# Altium PCB Radio.PcbDoc
Units mm, origin at the board's own origin, x right, y up, seen from the top; angles counter-clockwise.
Board outline 56.13 x 65.02 mm, 4 copper layers (Top Layer, Internal Plane 1, Internal Plane 2, Bottom Layer), stack 1.516 mm thick; 67 components, 62 nets, 303 pads, 202 vias.
Unrouted connection lines stored in the file: 1.
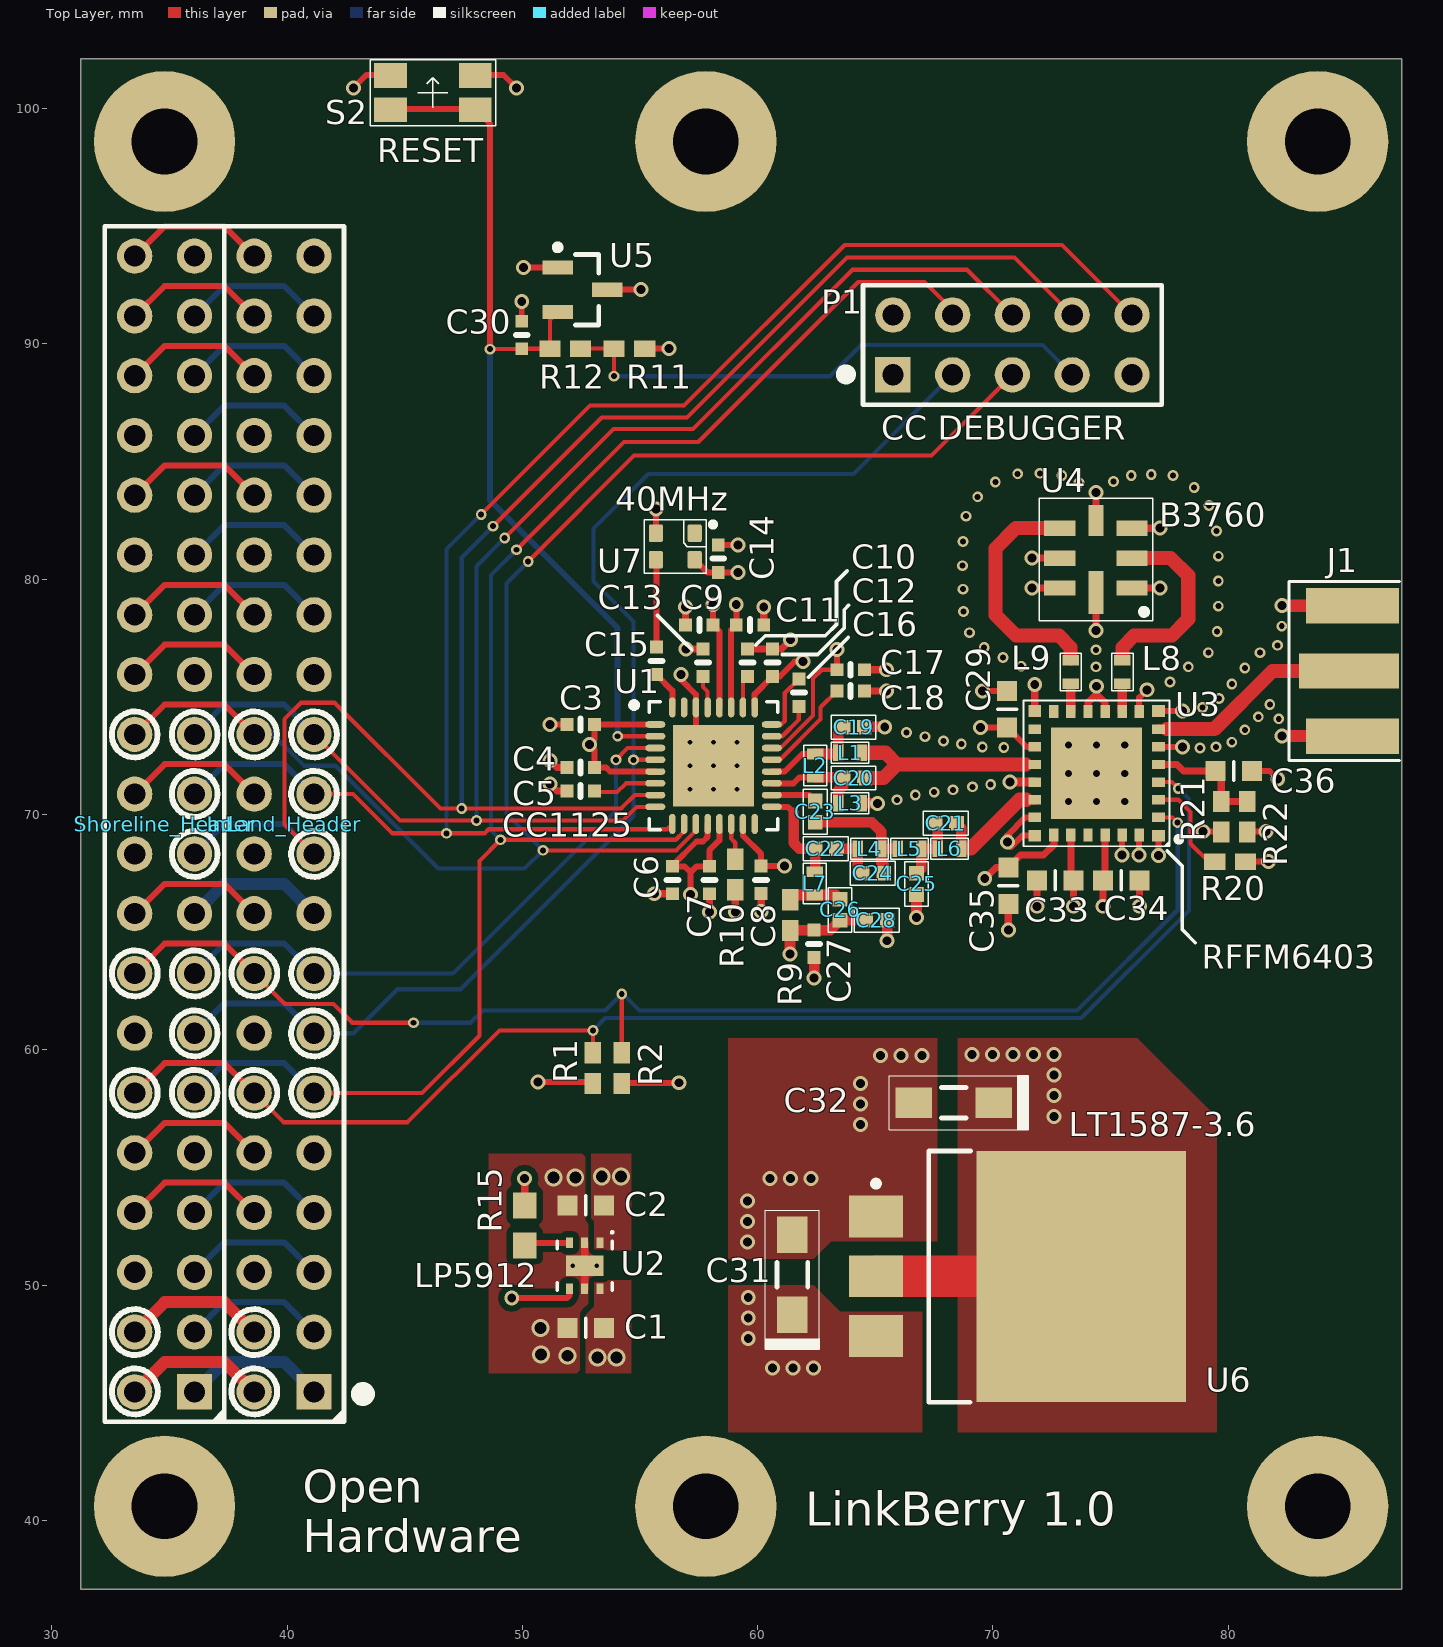
[diagram p0: Top Layer view]
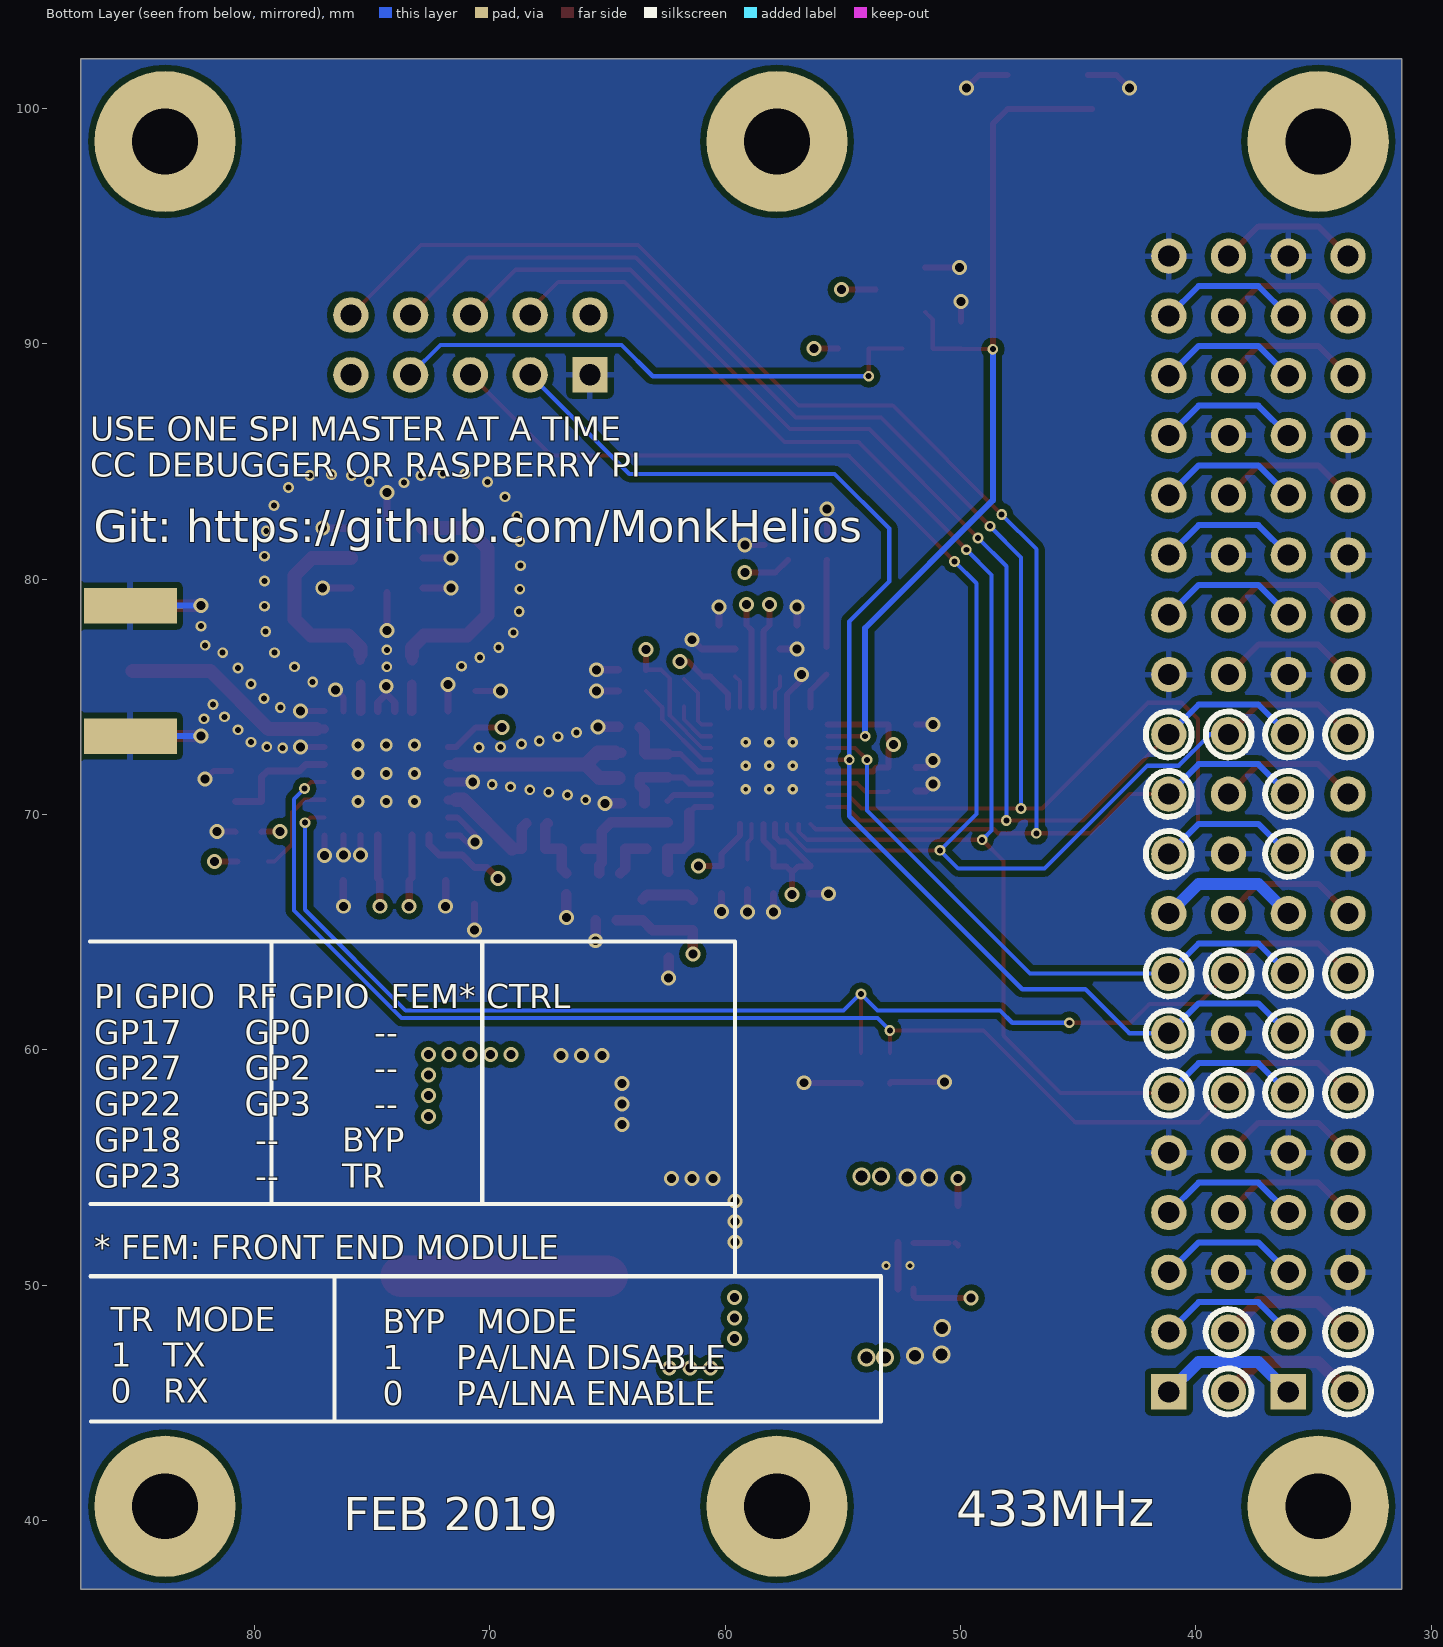
[diagram p1: Bottom Layer view, seen from below]
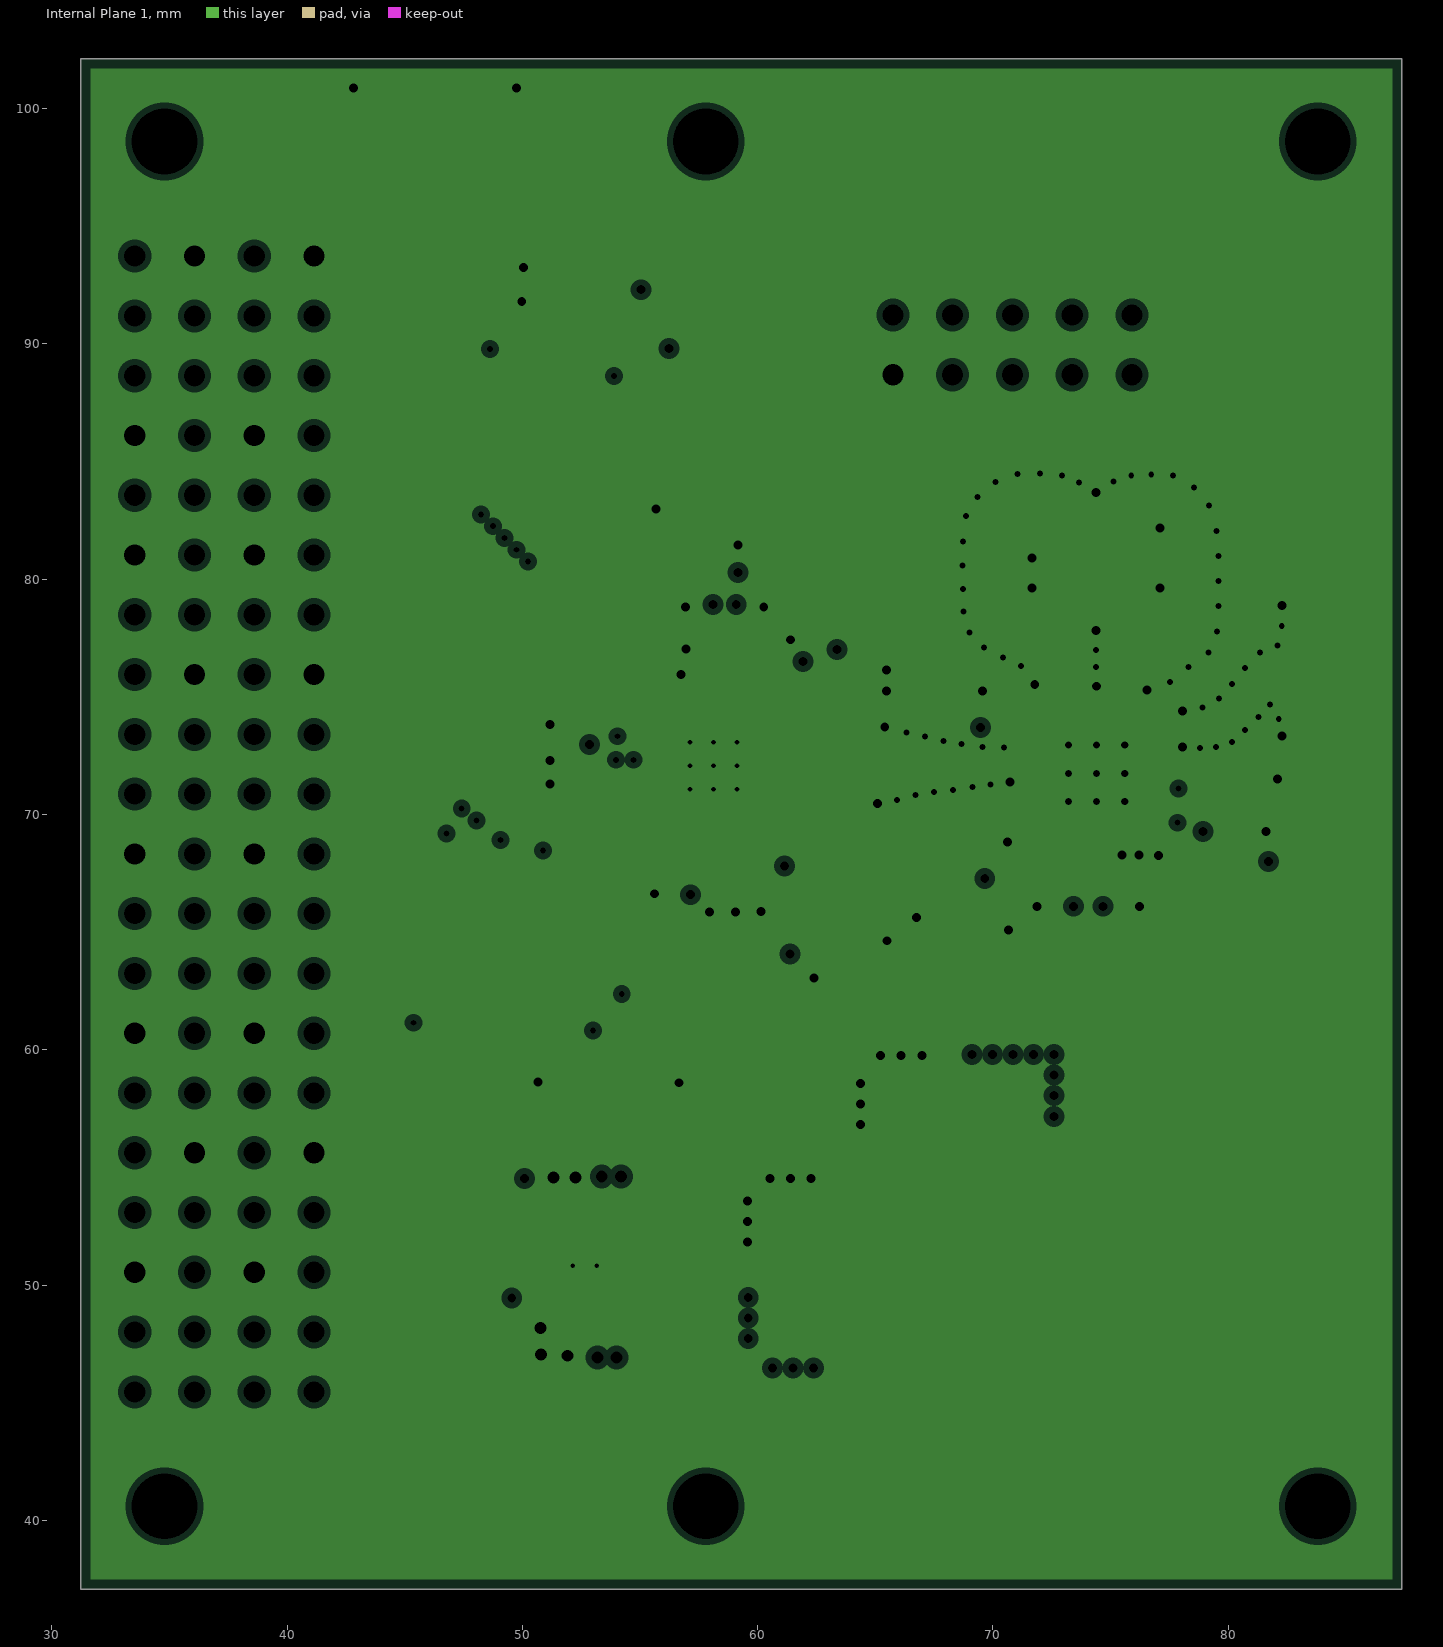
[diagram p2: Internal Plane 1, clearances drawn from the general rule]
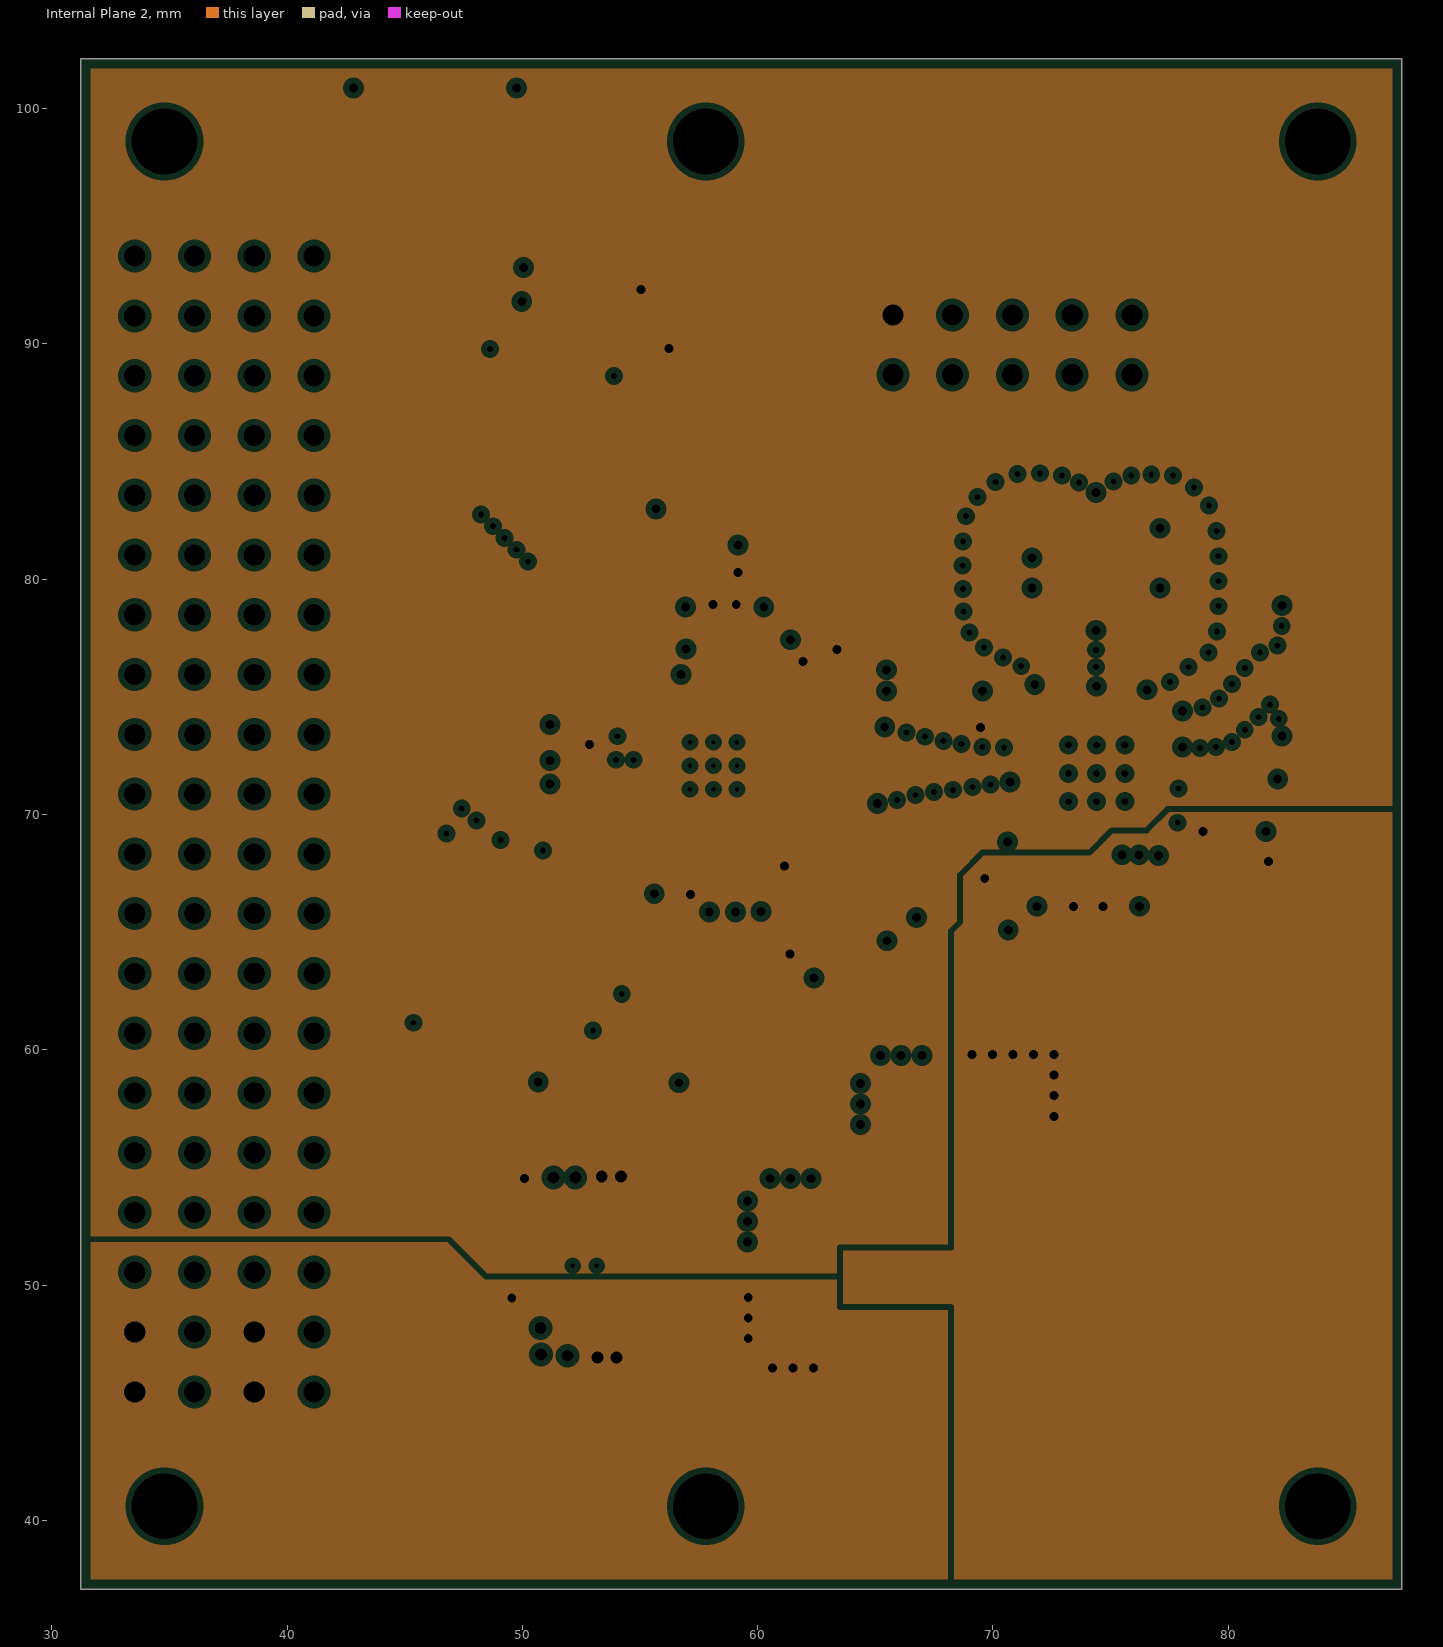
[diagram p3: Internal Plane 2, clearances drawn from the general rule]

## Layer stack, top to bottom
Top Solder: solder mask 0.0254, Solder Resist, Dk 3.5
Top Layer: signal copper 0.035
Dielectric 1: prepreg 0.35, FR-4, Dk 4.3
Internal Plane 1: plane copper 0.018, net GND
Dielectric 3: core 0.71, Dk 4.3
Internal Plane 2: plane copper 0.018, net (Multiple Nets)
Dielectric 2: prepreg 0.35, Dk 4.3
Bottom Layer: signal copper 0.035
Bottom Solder: solder mask 0.0254, Solder Resist, Dk 3.5

## Board outline
87.376,102.108 87.376,37.084 31.242,37.084 31.242,102.108

## Design rules (kind name [scope] priority, off if disabled: settings)
Clearance Clearance_16 [InNamedPolygon('GND_L04_P014')] p1: gap=0.254 ignorepadtopadclearanceinfootprint=FALSE except(0: Arc-Hole Track-Hole SMDPad-Hole THPad-Hole Via-Hole Fill-Hole Poly-Hole Region-Hole Text-Hole)
Clearance Clearance_15 [InNamedPolygon('GND_L04_P014')] p2: gap=0.203 ignorepadtopadclearanceinfootprint=FALSE
Clearance Clearance_14 [InNamedPolygon('top_VREG')] p3: gap=0.254 ignorepadtopadclearanceinfootprint=FALSE
Clearance Clearance_13 [InNamedPolygon('top_5V')] p4: gap=0.254 ignorepadtopadclearanceinfootprint=FALSE except(0: Arc-Hole Track-Hole SMDPad-Hole THPad-Hole Via-Hole Fill-Hole Poly-Hole Region-Hole Text-Hole)
Clearance Clearance_12 [InNamedPolygon('top_5V')] p5: gap=0.254 ignorepadtopadclearanceinfootprint=FALSE except(0: Arc-Hole Track-Hole SMDPad-Hole THPad-Hole Via-Hole Fill-Hole Poly-Hole Region-Hole Text-Hole)
Clearance Clearance_11 [InNamedPolygon('top_GND')] p6: gap=0.254 ignorepadtopadclearanceinfootprint=FALSE
Clearance Clearance_10 [InNamedPolygon('top_GND')] p7: gap=0.178 ignorepadtopadclearanceinfootprint=FALSE
Clearance Clearance_9 [InNamedPolygon('top_5V*')] p8: gap=0.178 ignorepadtopadclearanceinfootprint=TRUE
Clearance Clearance_8 [InNamedPolygon('top_GND')] p9: gap=0.203 ignorepadtopadclearanceinfootprint=FALSE
Clearance Clearance_7 [InNamedPolygon('top_GND')] p10: gap=0.254 ignorepadtopadclearanceinfootprint=TRUE
Clearance Clearance_6 [InNamedPolygon('top_GND*')] p11: gap=0.254 ignorepadtopadclearanceinfootprint=TRUE
Clearance Clearance_5 [InNamedPolygon('top_GND*')] p12: gap=0.178 ignorepadtopadclearanceinfootprint=TRUE
Clearance Clearance_4 [InNamedPolygon('top_VREG')] p13: gap=0.178 ignorepadtopadclearanceinfootprint=TRUE
Clearance Clearance_3 [InNamedPolygon('top_GND')] p14: gap=0.178 ignorepadtopadclearanceinfootprint=FALSE
Clearance Clearance_2 [InNamedPolygon('top_GND')] p15: gap=0.254 ignorepadtopadclearanceinfootprint=FALSE
Clearance Clearance_1 [InNamedPolygon('top_VREG')] p16: gap=0.254 ignorepadtopadclearanceinfootprint=TRUE
Clearance [All] p17: gap=0.127 ignorepadtopadclearanceinfootprint=TRUE
ComponentClearance [All] p1: gap=0 collisioncheckmode=3 verticalgap=0 showdistances=FALSE
MaxMinImpedance [All] p1: minimum=0.000 maximum=50.00
PermittedLayers [All] p1: toplayerpermitted=TRUE bottomlayerpermitted=TRUE
PlaneClearance [All] p1: clearance=0.254
PlaneConnect [All] p1: pad.planeconnectstyle=Relief pad.reliefexpansion=0.508 pad.reliefentries=4 pad.reliefconductorwidth=0.254 pad.reliefairgap=0.178 via.planeconnectstyle=Direct via.reliefexpansion=0.508 via.reliefentries=4 via.reliefconductorwidth=0.254 via.reliefairgap=0.254
PolygonConnect PolygonConnect_12 [All vs IsNamedPolygon('GND_L04_P014')] p1: thpad.connectstyle=Relief thpad.reliefconductorwidth=0.254 thpad.reliefentries=4 thpad.polygonreliefangle="90 Angle" thpad.airgapwidth=0.254 smdpad.connectstyle=Relief smdpad.reliefconductorwidth=0.254 smdpad.reliefentries=4 smdpad.polygonreliefangle="90 Angle" smdpad.airgapwidth=0.254 via.connectstyle=Direct via.reliefconductorwidth=0.254 via.reliefentries=4 via.polygonreliefangle="90 Angle" via.airgapwidth=0.254
PolygonConnect PolygonConnect_11 [All vs IsNamedPolygon('GND_L04_P014')] p2: thpad.connectstyle=Relief thpad.reliefconductorwidth=0.254 thpad.reliefentries=4 thpad.polygonreliefangle="90 Angle" thpad.airgapwidth=0.254 smdpad.connectstyle=Relief smdpad.reliefconductorwidth=0.254 smdpad.reliefentries=4 smdpad.polygonreliefangle="90 Angle" smdpad.airgapwidth=0.254 via.connectstyle=Direct via.reliefconductorwidth=0.254 via.reliefentries=4 via.polygonreliefangle="90 Angle" via.airgapwidth=0.254
PolygonConnect PolygonConnect_10 [All vs IsNamedPolygon('GND_L04_P014')] p3: thpad.connectstyle=Relief thpad.reliefconductorwidth=0.254 thpad.reliefentries=4 thpad.polygonreliefangle="90 Angle" thpad.airgapwidth=0.254 smdpad.connectstyle=Relief smdpad.reliefconductorwidth=0.254 smdpad.reliefentries=4 smdpad.polygonreliefangle="90 Angle" smdpad.airgapwidth=0.254 via.connectstyle=Direct via.reliefconductorwidth=0.254 via.reliefentries=4 via.polygonreliefangle="90 Angle" via.airgapwidth=0.254
PolygonConnect PolygonConnect_9 [All vs IsNamedPolygon('top_GND')] p4: connectstyle=Direct reliefconductorwidth=0.254 reliefentries=4 polygonreliefangle="90 Angle" airgapwidth=0.254
PolygonConnect PolygonConnect_8 [All vs IsNamedPolygon('top_GND')] p5: thpad.connectstyle=Relief thpad.reliefconductorwidth=0.254 thpad.reliefentries=4 thpad.polygonreliefangle="90 Angle" thpad.airgapwidth=0.254 smdpad.connectstyle=Relief smdpad.reliefconductorwidth=0.432 smdpad.reliefentries=4 smdpad.polygonreliefangle="90 Angle" smdpad.airgapwidth=0.178 via.connectstyle=Relief via.reliefconductorwidth=0.254 via.reliefentries=4 via.polygonreliefangle="90 Angle" via.airgapwidth=0.254
PolygonConnect PolygonConnect_7 [All vs IsNamedPolygon('top_GND')] p6: thpad.connectstyle=Relief thpad.reliefconductorwidth=0.254 thpad.reliefentries=4 thpad.polygonreliefangle="90 Angle" thpad.airgapwidth=0.254 smdpad.connectstyle=Relief smdpad.reliefconductorwidth=0.254 smdpad.reliefentries=4 smdpad.polygonreliefangle="90 Angle" smdpad.airgapwidth=0.254 via.connectstyle=Direct via.reliefconductorwidth=0.254 via.reliefentries=4 via.polygonreliefangle="90 Angle" via.airgapwidth=0.254
PolygonConnect PolygonConnect_6 [All vs IsNamedPolygon('top_5V*')] p7: connectstyle=Direct reliefconductorwidth=0.254 reliefentries=4 polygonreliefangle="90 Angle" airgapwidth=0.254
PolygonConnect PolygonConnect_5 [All vs IsNamedPolygon('top_GND')] p8: connectstyle=Direct reliefconductorwidth=0.254 reliefentries=4 polygonreliefangle="90 Angle" airgapwidth=0.254
PolygonConnect PolygonConnect_4 [All vs IsNamedPolygon('top_VREG')] p9: connectstyle=Direct reliefconductorwidth=0.254 reliefentries=4 polygonreliefangle="90 Angle" airgapwidth=0.254
PolygonConnect PolygonConnect_3 [All vs IsNamedPolygon('top_5V')] p10: connectstyle=Direct reliefconductorwidth=0.254 reliefentries=4 polygonreliefangle="90 Angle" airgapwidth=0.254
PolygonConnect PolygonConnect_2 [All vs IsNamedPolygon('top_GND*')] p11: connectstyle=Direct reliefconductorwidth=0.254 reliefentries=4 polygonreliefangle="90 Angle" airgapwidth=0.254
PolygonConnect PolygonConnect_1 [All vs IsNamedPolygon('top_3V6')] p12: connectstyle=Direct reliefconductorwidth=0.254 reliefentries=4 polygonreliefangle="90 Angle" airgapwidth=0.254
PolygonConnect [All] p13: thpad.connectstyle=Relief thpad.reliefconductorwidth=0.254 thpad.reliefentries=4 thpad.polygonreliefangle="90 Angle" thpad.airgapwidth=0.178 smdpad.connectstyle=Relief smdpad.reliefconductorwidth=0.254 smdpad.reliefentries=4 smdpad.polygonreliefangle="90 Angle" smdpad.airgapwidth=0.178 via.connectstyle=Direct via.reliefconductorwidth=0.254 via.reliefentries=4 via.polygonreliefangle="90 Angle" via.airgapwidth=0.254
RoutingVias [All] p1: holewidth=0.381 width=0.762 viastyle="Through Hole" minholewidth=0.254 minwidth=0.457 maxholewidth=0.762 maxwidth=1.27
SilkToSilkClearance [All] p1: silktosilkclearance=0.051
SilkToSolderMaskClearance [IsPad] p1: minsilkscreentomaskgap=0.051 clearancetoexposedcopper=TRUE
SolderMaskExpansion [All] p1: expansion=0.051
UnRoutedNet [All] p1: checkbadconnections=TRUE
ViasUnderSMD [All] p1: allowed=TRUE
Width [All] p1: maxlimit=2.54 minlimit=0.127 preferedwidth=0.178
24 further rules are at their usual default settings.

## Components (designator, comment, footprint, x,y, rotation, side; value= is the part's Value field where it differs from the comment)
C1 "10µF" SMD-0603C 52.7,48.189 r270 top
C2 "2.2µF" SMD-0603C 52.7,53.389 r270 top
C3 "47nF" SMD-0402C 52.475,73.825 r90 top
C4 "47nF" SMD-0402C 52.475,72 r90 top
C5 "220nF" SMD-0402C 52.475,71 r90 top
C6 "47nF" SMD-0402C 56.375,67.216 r0 top
C7 "47nF" SMD-0402C 57.95,67.216 r0 top
C8 "47nF" SMD-0402C 60.15,67.225 r0 top
C9 "47nF" SMD-0402C 57.525,78.05 r90 top
C10 "47nF" SMD-0402C 59.575,76.45 r180 top
C11 "47nF" SMD-0402C 59.675,78.05 r90 top
C12 "47nF" SMD-0402C 60.625,76.45 r0 top
C13 "47nF" SMD-0402C 57.675,76.45 r180 top
C14 "100nF" SMD-0402C 58.325,80.875 r180 top
C15 "22pF" SMD-0402C 55.7,76.525 r180 top
C16 "1.8nF" SMD-0402C 61.75,75.175 r0 top
C17 "47nF" SMD-0402C 63.95,76.15 r270 top
C18 "10nF" SMD-0402C 63.95,75.25 r270 top
C19 "C0402" 0402 63.625,73.7 r0 top value=5.1pF
C20 "C0402" 0402 63.625,71.55 r0 top value=5.1pF
C21 "C0402" 0402 67.55,69.625 r0 top value=DNM
C22 "C0402" 0402 62.45,68.55 r0 top value=39pF
C23 "C0402" 0402 62.45,69.675 r90 top value=5.1pF
C24 "C0402" 0402 64.45,67.5 r0 top value=2.2pF
C25 "C0402" 0402 66.75,66.6 r90 top value=6.2pF
C26 "C0402" 0402 63.5,65.5 r90 top value=56pF
C27 "10nF" SMD-0402C 62.4,64.5 r0 top
C28 "C0402" 0402 65.5,65.5 r180 top value=100pF
C29 "0.1µF" SMD-0603C 70.6,74.475 r0 top
C30 "1nF" SMD-0402C 49.975,90.375 r180 top
C31 "Component_1" PCBComponent_1#1 62.618,47.275 r90 top
C32 "Component_1" PCBComponent_1#1 71.5,58.893 r180 top
C33 "1µF" SMD-0603C 72.65,67.2 r270 top
C34 "1µF" SMD-0603C 75.45,67.2 r90 top
C35 "0.1µF" SMD-0603C 70.65,66.975 r180 top
C36 "0.1µF" SMD-0603C 80.225,71.85 r270 top
InLand_Header "Header 20X2" HDR2X20 41.148,45.466 r90 top
J1 "SMA EDGE" PCBComponent_1#2 85.125,76.1 r180 top
L1 "Component_1" LQW15AN80 63.925,72.625 r180 top
L2 "Component_1" LQW15AW80 62.45,72.075 r90 top
L3 "Component_1" LQW15AN80 63.925,70.475 r180 top
L4 "Component_1" LQW15AN80 64.75,68.55 r180 top
L5 "Component_1" LQW15AN80 66.45,68.55 r180 top
L6 "Component_1" LQW15AN80 68.15,68.55 r180 top
L7 "Component_1" LQW15AW80 62.425,67.075 r90 top
L8 "Component_1" LQW15AN80 75.5,76.05 r90 top
L9 "Component_1" LQW15AN80 73.3,76.05 r270 top
P1 "CC DEBUGGER" HDR2X5 65.745,88.685 r0 top
R1 "10K" 2-0402 53,59.225 r90 top
R2 "10K" 2-0402 54.225,59.225 r90 top
R9 "ERJ2GE" 2-0402 61.375,65.725 r90 top value=18
R10 "ERJ2GE" 2-0402 59.05,67.45 r90 top value=56K
R11 "10K" 2-0402 54.55,89.8 r0 top
R12 "10K" 2-0402 51.825,89.8 r0 top
R15 "ERA3Y" ERA-0603 50.1,52.539 r90 top value=47K
R20 "ERJ2GE" 2-0402 80.075,68 r180 top value=1K
R21 "ERJ2GE" 2-0402 79.7,69.9 r270 top value=3.3K
R22 "ERJ2GE" 2-0402 80.8,69.9 r90 top value=5.6K
S2 "RESET SWITCH" PCBComponent_1#3 46.2,100.675 r180 top
Shoreline_Header "Header 20X2" HDR2X20 36.068,45.466 r90 top
U1 "CC1125" "CC1125 QFN" 58.125,72.075 r0 top
U2 "LP5912" LP5912_WSON 52.65,50.825 r270 top
U3 "RFFM6403" PCBComponent_1#4 74.4,71.75 r180 top
U4 "B3760" PCBComponent_1#5 75.91,79.625 r90 top
U5 "TLV803S" SOT95P237X110-3N 52.55,92.3 r0 top
U6 "LT1587-3.6" LT1587 71.225,50.375 r0 top
U7 "TG-5006CJ" TG-5006CJ 55.675,80.825 r0 top

## Footprints (in the part's own frame and the unit in brackets; to place one, negate y for a bottom-side part, rotate by r counter-clockwise, add the part's x,y. Pads: shape width x height; smd on the part's side, far side on the other; paste and mask are expansions set on the pad)
2-0402 [mm] "Chip Resistor; Body 1 x 0.5 mm (LxW typ)"
  rect 0.9x0.7 smd: 1(-0.65,0) 2(0.65,0)
0402 [mm] "Chip Capacitor; Body 1.0 x 0.5 mm (LxW typ)"
  rect 0.62x0.62 smd mask+0.08: 1(0,0) 2(0.9,0)
  silkscreen extent -0.51,-0.51 1.4,0.51
"CC1125 QFN" [mm] "QFN, 32-Leads, Body 5.00x5.00mm, Pitch 0.50mm, Thermal Pad 3.78x3.78mm, IPC Medium Density"
  oval 0.85x0.28 smd: 1(-2.475,1.75) 2(-2.475,1.25) 3(-2.475,0.75) 4(-2.475,0.25) 5(-2.475,-0.25) 6(-2.475,-0.75) 7(-2.475,-1.25) 8(-2.475,-1.75) 17(2.475,-1.75) 18(2.475,-1.25) 19(2.475,-0.75) 20(2.475,-0.25) 21(2.475,0.25) 22(2.475,0.75) 23(2.475,1.25) 24(2.475,1.75)
  oval 0.28x0.85 smd: 9(-1.75,-2.475) 10(-1.25,-2.475) 11(-0.75,-2.475) 12(-0.25,-2.475) 13(0.25,-2.475) 14(0.75,-2.475) 15(1.25,-2.475) 16(1.75,-2.475) 25(1.75,2.475) 26(1.25,2.475) 27(0.75,2.475) 28(0.25,2.475) 29(-0.25,2.475) 30(-0.75,2.475) 31(-1.25,2.475) 32(-1.75,2.475)
  rect 3.45x3.45 smd paste-0.6: 33(0,0)
  silkscreen extent -3.5,-2.73 2.73,2.72, body extent -2.57,-2.58 2.58,2.57, height 1
ERA-0603 [mm] "Chip Resistor; Body 1.6 x 0.8 mm (LxW typ)"
  rect 1.1x1 smd: 1(-0.85,0) 2(0.85,0)
HDR2X5 [mm] "Connector; Header; 5x2 Position"
  rect 1.5x1.5 hole 0.9: 1(0,0)
  round 1.5 hole 0.9: 2(0,2.54) 3(2.54,0) 4(2.54,2.54) 5(5.08,0) 6(5.08,2.54) 7(7.62,0) 8(7.62,2.54) 9(10.16,0) 10(10.16,2.54)
  silkscreen extent -1.27,-1.27 11.43,3.81
HDR2X20 [mm] "Connector; Header; 20x2 Position"
  rect 1.5x1.5 hole 0.9: 1(0,0)
  round 1.5 hole 0.9: 2(0,2.54) 3(2.54,0) 4(2.54,2.54) 5(5.08,0) 6(5.08,2.54) 7(7.62,0) 8(7.62,2.54) 9(10.16,0) 10(10.16,2.54) 11(12.7,0) 12(12.7,2.54) 13(15.24,0) 14(15.24,2.54) 15(17.78,0) 16(17.78,2.54) 17(20.32,0) 18(20.32,2.54) 19(22.86,0) 20(22.86,2.54) 21(25.4,0) 22(25.4,2.54) 23(27.94,0) 24(27.94,2.54) 25(30.48,0) 26(30.48,2.54) 27(33.02,0) 28(33.02,2.54) 29(35.56,0) 30(35.56,2.54) 31(38.1,0) 32(38.1,2.54) 33(40.64,0) 34(40.64,2.54) 35(43.18,0) 36(43.18,2.54) 37(45.72,0) 38(45.72,2.54) 39(48.26,0) 40(48.26,2.54)
  silkscreen extent -1.27,-1.27 49.53,3.81
LP5912_WSON [mm] "SON, 6-Leads, Body 2.00x2.00mm, Pitch 0.65mm, Thermal Pad 1.60x0.89mm, IPC Medium Density"
  rect 0.45x0.3 smd: 1(-0.975,0.65) 2(-0.975,0) 3(-0.975,-0.65) 4(0.975,-0.65) 5(0.975,0) 6(0.975,0.65)
  rect 0.89x1.6 smd: 7(0,0)
  silkscreen extent -1.47,-1.17 1.05,1.22, body extent -1.05,-1.05 1.05,1.05, height 0.8
LQW15AN80 [mm] "chip inductor , wire wound"
  rect 0.45x0.7 smd: 1(-0.5,0) 2(0.5,0)
  silkscreen extent -0.8,-0.45 0.8,0.45, body extent -0.55,-0.3 0.55,0.3, height 0.6
LQW15AW80 [mm] "Chip Inductor, 2-Leads, Body 1.02x0.61mm, IPC Medium Density"
  rect 0.45x0.7 smd: 1(-0.495,0) 2(0.495,0)
  silkscreen extent -0.86,-0.48 0.86,0.48, body extent -0.56,-0.36 0.56,0.36, height 0.61
LT1587 [mil] "D2-PAK, 4-Pads, Body 7.80x8.63mm (max), IPC Medium Density"
  rect 90x70 smd: 1(-244.09,100) 2(-244.09,0) 3(-244.09,-100)
  rect 350x420 smd paste-62.99: 4(99.41,0)
  silkscreen extent -249,-211 -86,210
PCBComponent_1#1 [mm]
  rect 1.55x1.3 smd: 1(1.475,1.143) 2(4.875,1.143)
  silkscreen extent 0,0 5.9,2.29, body extent 1.05,0.51 5.3,1.78, height 1.27
PCBComponent_1#2 [mm]
  rect 4.25x1.5 smd mask+0.05: 1(0,0)
  rect 3.95x1.5 smd mask+0.05: 2(-0.15,2.77) 2(-0.15,-2.77)
  rect 3.95x1.5 smd far side mask+0.05: 2(-0.15,2.77) 2(-0.15,-2.77)
  silkscreen extent -2.16,-3.81 2.54,3.81
PCBComponent_1#3 [mm]
  rect 1.4x1.05 smd mask+0.05: 1(-1.8,0.725) 2(-1.8,-0.725) 3(1.8,-0.725) 4(1.8,0.725)
  silkscreen extent -2.67,-1.4 2.67,1.4
PCBComponent_1#4 [mm]
  rect 0.55x0.5 smd paste-0.02 mask+0.065: 1(-2.625,2.65) 8(-2.625,-2.65) 15(2.625,-2.65) 22(2.625,2.65)
  rect 0.55x0.4 smd paste-0.02 mask+0.065: 2(-2.625,1.875) 3(-2.625,1.125) 4(-2.625,0.375) 5(-2.625,-0.375) 6(-2.625,-1.125) 7(-2.625,-1.875) 16(2.625,-1.875) 17(2.625,-1.125) 18(2.625,-0.375) 19(2.625,0.375) 20(2.625,1.125) 21(2.625,1.875)
  rect 0.4x0.55 smd paste-0.02 mask+0.065: 9(-1.813,-2.625) 10(-1.088,-2.625) 11(-0.363,-2.625) 12(0.363,-2.625) 13(1.088,-2.625) 14(1.813,-2.625) 23(1.813,2.625) 24(1.088,2.625) 25(0.363,2.625) 26(-0.363,2.625) 27(-1.088,2.625) 28(-1.813,2.625)
  rect 3.875x3.875 smd paste-0.7 mask+0.065: 29(0,0)
  silkscreen extent -3.6,-3.1 3.1,3.1
PCBComponent_1#5 [mm]
  rect 0.65x1.33 smd: 1(0,0) 2(1.27,0) 3(2.54,0) 5(2.54,3.07) 6(1.27,3.07) 7(0,3.07)
  rect 1.33x0.65 smd: 4(2.87,1.535)
  rect 1.83x0.65 smd: 8(-0.2,1.535)
  silkscreen extent -1.4,-0.89 3.81,3.94
SMD-0402C [mm]
  rect 0.55x0.55 smd: 1(0,0.584) 2(0,-0.584)
  silkscreen extent -0.25,0 0.25,0, body extent -0.25,-0.51 0.25,0.51, height 0.51
SMD-0603C [mm]
  rect 0.85x0.85 smd: 1(0,0.775) 2(0,-0.775)
  silkscreen extent -0.4,0 0.4,0, body extent -0.4,-0.8 0.4,0.8, height 0.9
SOT95P237X110-3N [mm] "SOT23, 3-Leads, Body 2.90x2.37mm, Pitch 0.95mm, IPC Medium Density"
  rect 1.3x0.6 smd: 1(-1.05,0.95) 2(-1.05,-0.95) 3(1.05,0)
  silkscreen extent -1.17,-1.5 0.7,1.92, body extent -1.32,-1.5 1.32,1.5, height 1.1
TG-5006CJ [mm]
  rrect25% 0.6x0.75 smd: 1(1.65,1.13) 2(0,1.13) 3(0,0) 4(1.65,0)
  silkscreen extent -0.5,-0.58 2.52,1.7

## Part data
C1 C2 C29 C35 C36: library part GCJ188R71C104KA01D, "CAP CER 0.1UF 16V X7R 0603", Digi-Key Part Number=490-5796-1-ND, Manufacturer="Murata Electronics North America", Operating Temperature="-55°C ~ 125°C", Package / Case="0603 (1608 Metric)", Ratings=AEC-Q200, Temperature Coefficient=X7R, Tolerance=±10%, Voltage=16V, @ qty=0, Applications="Automotive, Boardflex Sensitive", Datasheets=http://www.murata.com/~/media/webrenewal/support/library/catalog/products/capacitor/mlcc/c03e.ashx, Factory Stock=0, Features="Soft Termination", Height - Seated (Max)=-, Image=//media.digikey.com/Renders/Murata%20Renders/0603%28LQG18%29.jpg, Lead Spacing=-, Lead Style=-, Minimum Quantity=1, Mounting Type="Surface Mount, MLCC", Packaging="Cut Tape (CT)", Part Number=GCJ188R71C104KA01D, Part Status=Active, Quantity Available=22473, Series=GCJ, Size / Dimension="0.063\" L x 0.031\" W (1.60mm x 0.80mm)", Thickness (Max)="0.035\" (0.90mm)", Unit Price (USD)=0.21
C3 C4 C5 C6 C7 C8 C9 C10 C11 C12 C13 C14 C17 C18 C27 C30: library part GCM155C71A105KE38D, "CAP CER 1UF 10V X7S 0402", Digi-Key Part Number=490-13409-1-ND, Manufacturer="Murata Electronics North America", Operating Temperature="-55°C ~ 125°C", Package / Case="0402 (1005 Metric)", Ratings=AEC-Q200, Temperature Coefficient=X7S, Tolerance=±10%, Voltage=10V, @ qty=0, Applications=Automotive, Datasheets=http://www.murata.com/~/media/webrenewal/support/library/catalog/products/capacitor/mlcc/c03e.ashx, Factory Stock=0, Features=-, Height - Seated (Max)=-, Image=//media.digikey.com/Renders/Murata%20Renders/ZRB-SERIES-0402.jpg, Lead Spacing=-, Lead Style=-, Minimum Quantity=1, Mounting Type="Surface Mount, MLCC", Packaging="Cut Tape (CT)", Part Number=GCM155C71A105KE38D, Part Status=Active, Quantity Available=7240, Series=GCM, Size / Dimension="0.039\" L x 0.020\" W (1.00mm x 0.50mm)", Thickness (Max)="0.022\" (0.55mm)", Unit Price (USD)=0.12
C15: library part GCM155C71A105KE38D, "CAP CER 1UF 50V NP0 0402", Digi-Key Part Number=490-13409-1-ND, Manufacturer="Murata Electronics North America", Operating Temperature="-55°C ~ 125°C", Package / Case="0402 (1005 Metric)", Ratings=AEC-Q200, Temperature Coefficient=X7S, Tolerance=±10%, Voltage=10V, @ qty=0, Applications=Automotive, Datasheets=http://www.murata.com/~/media/webrenewal/support/library/catalog/products/capacitor/mlcc/c03e.ashx, Factory Stock=0, Features=-, Height - Seated (Max)=-, Image=//media.digikey.com/Renders/Murata%20Renders/ZRB-SERIES-0402.jpg, Lead Spacing=-, Lead Style=-, Minimum Quantity=1, Mounting Type="Surface Mount, MLCC", Packaging="Cut Tape (CT)", Part Number=GCM155C71A105KE38D, Part Status=Active, Quantity Available=7240, Series=GCM, Size / Dimension="0.039\" L x 0.020\" W (1.00mm x 0.50mm)", Thickness (Max)="0.022\" (0.55mm)", Unit Price (USD)=0.12
C16: library part GCM155C71A105KE38D, "CAP CER 1.8nF 10V X7S 0402", Digi-Key Part Number=490-13409-1-ND, Manufacturer="Murata Electronics North America", Operating Temperature="-55°C ~ 125°C", Package / Case="0402 (1005 Metric)", Ratings=AEC-Q200, Temperature Coefficient=X7S, Tolerance=±10%, Voltage=10V, @ qty=0, Applications=Automotive, Datasheets=http://www.murata.com/~/media/webrenewal/support/library/catalog/products/capacitor/mlcc/c03e.ashx, Factory Stock=0, Features=-, Height - Seated (Max)=-, Image=//media.digikey.com/Renders/Murata%20Renders/ZRB-SERIES-0402.jpg, Lead Spacing=-, Lead Style=-, Minimum Quantity=1, Mounting Type="Surface Mount, MLCC", Packaging="Cut Tape (CT)", Part Number=GCM155C71A105KE38D, Part Status=Active, Quantity Available=7240, Series=GCM, Size / Dimension="0.039\" L x 0.020\" W (1.00mm x 0.50mm)", Thickness (Max)="0.022\" (0.55mm)", Unit Price (USD)=0.12
C19 C20 C21 C22 C23 C24 C25 C26 C28: "Ceramic Chip Capacitor - Standard", PackageDocument=Mar-2001, Code_IPC="1005 [0402]", Code_JEITA=0402, ComponentLink1Description="Manufacturer Link", ComponentLink1URL=http://www.kemet.com/, ComponentLink2Description=Datasheet, ComponentLink2URL=http://www.kemet.com/kemet/web/homepage/kechome.nsf/vapubfilesname/F3102TA.pdf/$file/F3102TA.pdf, DatasheetDocument=Mar-2001, LatestRevisionDate=19-Mar-2004, LatestRevisionNote="Silkscreen size reduced.", Note="Footprint corresponds to dimensions for bulk cassette packaging. This case size has tightened tolerances.", PackageReference=0402, Published=17-Jul-2002, Publisher="Altium Limited"
C33 C34: library part GCJ188R71C104KA01D, "CAP CER 1UF 16V X7R 0603", Digi-Key Part Number=490-5796-1-ND, Manufacturer="Murata Electronics North America", Operating Temperature="-55°C ~ 125°C", Package / Case="0603 (1608 Metric)", Ratings=AEC-Q200, Temperature Coefficient=X7R, Tolerance=±10%, Voltage=16V, @ qty=0, Applications="Automotive, Boardflex Sensitive", Datasheets=http://www.murata.com/~/media/webrenewal/support/library/catalog/products/capacitor/mlcc/c03e.ashx, Factory Stock=0, Features="Soft Termination", Height - Seated (Max)=-, Image=//media.digikey.com/Renders/Murata%20Renders/0603%28LQG18%29.jpg, Lead Spacing=-, Lead Style=-, Minimum Quantity=1, Mounting Type="Surface Mount, MLCC", Packaging="Cut Tape (CT)", Part Number=GCJ188R71C104KA01D, Part Status=Active, Quantity Available=22473, Series=GCJ, Size / Dimension="0.063\" L x 0.031\" W (1.60mm x 0.80mm)", Thickness (Max)="0.035\" (0.90mm)", Unit Price (USD)=0.21
InLand_Header Shoreline_Header: "Header, 20-Pin, Dual row", LatestRevisionDate=17-Jul-2002, LatestRevisionNote="Re-released for DXP Platform.", Publisher="Altium Limited"
J1 S2 U4 U5 U6: library part Component_1
  U6: =LT-1587-3.6
P1: library part "Header 5X2", "Header, 5-Pin, Dual row", LatestRevisionDate=17-Jul-2002, LatestRevisionNote="Re-released for DXP Platform.", Publisher="Altium Limited"
R1 R2 R11 R12: library part ERJ2RE, "Precision Thick Film Chip Resistor, 10 Ohm to 1M Ohm Range, 1% and 0.5% Tolerance, 0402 Size, 0.063 W", PackageDocument=Mar-2003, Code_IPC="1005 [0402]", ComponentLink1Description="Manufacturer Link", ComponentLink1URL=http://www.panasonic.com/industrial/components/resistive_products.htm, ComponentLink2Description=Datasheet, ComponentLink2URL=http://www.panasonic.com/industrial/components/pdf/AOA0000CE2.pdf, LatestRevisionDate=19-Mar-2004, LatestRevisionNote="Silkscreen size reduced.", PackageReference=2-0402, Published=17-Dec-2003, Publisher="Altium Limited"
  R1 R2: =10K
  R11: =33K
  R12: =2.7K
R9 R10 R20 R21 R22: "Thick Film Chip Resistor, 1 Ohm to 2.2M Ohm Range, 5% Tolerance, 0402 Size, 0.063 W", PackageDocument=Mar-2003, Code_IPC="1005 [0402]", ComponentLink1Description="Manufacturer Link", ComponentLink1URL=http://www.panasonic.com/industrial/components/resistive_products.htm, ComponentLink2Description=Datasheet, ComponentLink2URL=http://www.panasonic.com/industrial/components/pdf/AOA0000CE1.pdf, LatestRevisionDate=19-Mar-2004, LatestRevisionNote="Silkscreen size reduced.", Note="If flow soldering, adjust pad width of PCB Footprint to 0.7 - 0.8 times the width of the resistor.", PackageReference=2-0402, Published=17-Dec-2003, Publisher="Altium Limited"
R15: "Rectangular Thick Film Chip Resistor, 10 Ohm to 330k Ohm Range, 0.1% and 0.5% Tolerance, 0603 Size, 0.063 W", PackageDocument=Mar-2003, Code_IPC="1608 [0603]", ComponentLink1Description="Manufacturer Link", ComponentLink1URL=http://www.panasonic.com/industrial/components/resistive_products.htm, ComponentLink2Description=Datasheet, ComponentLink2URL=http://www.panasonic.com/industrial/components/pdf/AOA0000CE8.pdf, LatestRevisionDate=19-Mar-2004, LatestRevisionNote="Silkscreen size reduced.", Note="If flow soldering, adjust pad width of PCB Footprint to 0.7 - 0.8 times the width of the resistor.", PackageReference=ERA-0603, Published=17-Dec-2003, Publisher="Altium Limited"
C31 C32: =10uF
L1 L3: =27nH
L2 L7: =56nH
L4: =15nH
L5: =43nH
L6: =22nH
L8 L9: =33nH

## Free pads (board coordinates)
  round 6 hole 2.794 unplated: 77(34.798,40.602) 78(34.798,98.598) 79(57.798,98.598) 80(57.798,40.602) 81(83.798,98.598) 82(83.798,40.602)

## Via types
v1: diameter 0.635, hole 0.381, Top Layer to Bottom Layer, tented both sides, 96 vias
v2: diameter 0.457, hole 0.254, Top Layer to Bottom Layer, tented both sides, 77 vias
v3: diameter 0.762, hole 0.508, Top Layer to Bottom Layer, tented both sides, 9 vias
v4: diameter 0.55, hole 0.3, Top Layer to Bottom Layer, tented bottom, 9 vias
v5: diameter 0.45, hole 0.2, Top Layer to Bottom Layer, tented bottom, 9 vias
v6: diameter 0.381, hole 0.2, Top Layer to Bottom Layer, tented bottom, 2 vias

## Nets (pads, with @x,y where several pads share a name; then routed paths per layer and width w, separated by ;. In a path a pad name is that pad's centre, name@x,y a point inside that pad or via, vN(x,y) a via of type N, cw(c..) or ccw(c..) an arc to the next point about the centre after c; other vN are vias at no path point)
3: InLand_Header.3 Shoreline_Header.3 | length 6.1
  Bottom Layer w0.254: Shoreline_Header.3 37.338,49.276 39.878,49.276 InLand_Header.3
3V3: InLand_Header.1 InLand_Header.17 Shoreline_Header.1 Shoreline_Header.17 | length 12.3
  Bottom Layer w0.508: Shoreline_Header.1 37.338,46.736 39.878,46.736 InLand_Header.1 ; Shoreline_Header.17 37.338,67.056 39.878,67.056 InLand_Header.17
3V6: C32.1 C33.1 C34.1 C35.2 R20.1 R21.2 U3.23 U3.24 U3.26 U6.2 U6.4 | length 20.6
  Top Layer w0.254: v1(78.925,69.275) 79.675,69.275 R21.2 ; R20.1 v1(81.7,68)
  Top Layer w0.305: v1(69.65,67.275) 70.125,67.75 C35.2 71.175,68.275 72.15,68.275 72.587,68.712 U3.23 ; U3.24 73.312,67.313 C33.1 v1(73.425,66.1) ; v1(74.675,66.1) C34.1 74.763,67.288 U3.26
  Top Layer w1.778: U6.2 U6.4
  other v1: 72.6,57.175 72.6,58.05 72.6,58.925 69.1,59.8 69.975,59.8 70.85,59.8 71.725,59.8 72.6,59.8
5: InLand_Header.5 Shoreline_Header.5 | length 6.1
  Bottom Layer w0.254: Shoreline_Header.5 37.338,51.816 39.878,51.816 InLand_Header.5
5V: C1.1 C31.1 InLand_Header.2 InLand_Header.4 Shoreline_Header.2 Shoreline_Header.4 U2.4 U2.6 U6.3 | length 15.1
  Top Layer w0.254: v1(49.55,49.45) 51.9,49.45 52,49.55 U2.4
  Top Layer w0.508: Shoreline_Header.2 34.798,46.736 37.338,46.736 InLand_Header.2 ; Shoreline_Header.4 34.798,49.276 37.338,49.276 InLand_Header.4
  other v1: 60.625,46.475 61.5,46.475 62.375,46.475 59.6,47.725 59.6,48.6 59.6,49.475
  other v3: 53.2,46.925 54,46.925
7: InLand_Header.7 Shoreline_Header.7 | length 6.1
  Bottom Layer w0.254: Shoreline_Header.7 37.338,54.356 39.878,54.356 InLand_Header.7
8: InLand_Header.8 Shoreline_Header.8 | length 6.1
  Top Layer w0.254: Shoreline_Header.8 34.798,54.356 37.338,54.356 InLand_Header.8
10: InLand_Header.10 Shoreline_Header.10 | length 6.1
  Top Layer w0.254: Shoreline_Header.10 34.798,56.896 37.338,56.896 InLand_Header.10
18: InLand_Header.18 Shoreline_Header.18 | length 6.1
  Top Layer w0.254: Shoreline_Header.18 34.798,67.056 37.338,67.056 InLand_Header.18
22: InLand_Header.22 Shoreline_Header.22 | length 6.1
  Top Layer w0.254: Shoreline_Header.22 34.798,72.136 37.338,72.136 InLand_Header.22
26: InLand_Header.26 Shoreline_Header.26 | length 6.1
  Top Layer w0.254: Shoreline_Header.26 34.798,77.216 37.338,77.216 InLand_Header.26
27: InLand_Header.27 Shoreline_Header.27 | length 6.1
  Bottom Layer w0.254: Shoreline_Header.27 37.338,79.756 39.878,79.756 InLand_Header.27
28: InLand_Header.28 Shoreline_Header.28 | length 6.1
  Top Layer w0.254: Shoreline_Header.28 34.798,79.756 37.338,79.756 InLand_Header.28
29: InLand_Header.29 Shoreline_Header.29 | length 6.1
  Bottom Layer w0.254: Shoreline_Header.29 37.338,82.296 39.878,82.296 InLand_Header.29
31: InLand_Header.31 Shoreline_Header.31 | length 6.1
  Bottom Layer w0.254: Shoreline_Header.31 37.338,84.836 39.878,84.836 InLand_Header.31
32: InLand_Header.32 Shoreline_Header.32 | length 6.1
  Top Layer w0.254: Shoreline_Header.32 34.798,84.836 37.338,84.836 InLand_Header.32
33: InLand_Header.33 Shoreline_Header.33 | length 6.1
  Bottom Layer w0.254: Shoreline_Header.33 37.338,87.376 39.878,87.376 InLand_Header.33
35: InLand_Header.35 Shoreline_Header.35 | length 6.1
  Bottom Layer w0.254: Shoreline_Header.35 37.338,89.916 39.878,89.916 InLand_Header.35
36: InLand_Header.36 Shoreline_Header.36 | length 6.1
  Top Layer w0.254: Shoreline_Header.36 34.798,89.916 37.338,89.916 InLand_Header.36
37: InLand_Header.37 Shoreline_Header.37 | length 6.1
  Bottom Layer w0.254: Shoreline_Header.37 37.338,92.456 39.878,92.456 InLand_Header.37
38: InLand_Header.38 Shoreline_Header.38 | length 6.1
  Top Layer w0.254: Shoreline_Header.38 34.798,92.456 37.338,92.456 InLand_Header.38
40: InLand_Header.40 Shoreline_Header.40 | length 6.1
  Top Layer w0.254: Shoreline_Header.40 34.798,94.996 37.338,94.996 InLand_Header.40
BYP: InLand_Header.12 R1.2 Shoreline_Header.12 U3.4 | length 57.4
  Top Layer w0.178: InLand_Header.12 39.849,56.925 45.125,56.925 49.025,60.825 v2(53,60.825) R1.2 ; U3.4 77.6,71.375 v2(77.875,71.1)
  Top Layer w0.254: Shoreline_Header.12 34.798,59.436 37.338,59.436 InLand_Header.12
  Bottom Layer w0.178: v2(53,60.825) 53.525,61.35 73.75,61.35 78.325,65.925 78.325,70.65 v2(77.875,71.1)
CSn: InLand_Header.24 P1.5 Shoreline_Header.24 U1.11 | length 65.4
  Top Layer w0.178: v2(50.25,80.75) 54.75,85.25 67.39,85.25 P1.5 ; v2(50.875,68.477) v2(50.875,68.477) 50.877,68.475 56.538,68.475 57.375,69.312 U1.11
  Top Layer w0.254: Shoreline_Header.24 34.798,74.676 37.338,74.676 InLand_Header.24
  Bottom Layer w0.178: InLand_Header.24 39.394,73.406 40.725,72.075 42.05,72.075 46.425,67.7 50.098,67.7 v2(50.875,68.477) 49.325,70.027 49.325,79.825 v2(50.25,80.75)
GND: C1.2 C2.2 C3.1 C4.1 C5.1 C6.2 C7.2 C8.2 C9.1 C10.2 C11.2 C12.1 C13.2 C14.2 C17.1 C18.1 C19.2 C25.1 C27.2 C28.1 C29.1 C30.2 C31.2 C32.2 C33.2 C34.2 C35.1 C36.1 InLand_Header.6 InLand_Header.9 InLand_Header.14 InLand_Header.20 InLand_Header.25 InLand_Header.30 InLand_Header.34 InLand_Header.39 J1.2 L3.1 P1.1 R1.1 R2.1 R10.1 R22.1 S2.2 S2.3 Shoreline_Header.6 Shoreline_Header.9 Shoreline_Header.14 Shoreline_Header.20 Shoreline_Header.25 Shoreline_Header.30 Shoreline_Header.34 Shoreline_Header.39 U1.30 U1.33 U2.2 U2.5 U2.7 U3.1 U3.6 U3.8 U3.9 U3.11 U3.12 U3.15 U3.19 U3.21 U3.22 U3.27 U3.28 U3.29 U4.1 U4.3 U4.4 U4.6 U4.7 U4.8 U5.1 U6.1 U7.2 | length 73.5
  Top Layer w0.254: v1(42.825,100.875) 43.375,101.425 S2.3@44.575,101.425 ; S2.2@48,101.425 49.2,101.425 v1(49.75,100.875) ; C30.2 v1(49.975,91.8) ; v1(50.05,93.25) U5.1 ; v1(50.675,58.625) 52.95,58.625 R1.1 ; v1(51.175,73.825) C3.1 ; R2.1 54.25,58.6 v1(56.65,58.6) ; U7.2 v1(55.675,82.975) ; v1(56.75,75.95) 56.75,75.725 57.375,75.1 U1.30 57.375,73.325 v5(57.125,73.075) ; C14.2 v1(59.166,81.459) ; v1(69.55,75.25) C29.1 ; U3.22 71.25,69.1 70.775,68.625 70.625,68.775 v1(70.625,68.825) 70.625,69.075 70.6,69.1 71.375,69.875 U3.21 ; v1(75.488,68.288) U3.27 ; v1(76.213,68.288) U3.28 ; U3.9 76.213,74.963 v1(76.55,75.3) ; v1(77.025,68.263) U3.1 ; U3.6 v1(78.05,72.875) ; U3.8 v1(78.05,74.4) ; R22.1 80.825,69.275 v1(81.6,69.275) ; C36.1 81.75,71.85 v1(82.1,71.5) ; J1.2@85.345,78.875 J1.2@85.35,78.87
  Top Layer w0.304: v1(51.175,71.3) 51.475,71 C5.1 ; v1(51.175,72.3) 51.475,72 C4.1 ; v1(55.607,66.632) C6.2 ; C9.1 v1(56.941,78.816) ; v1(56.95,77.034) C13.2 ; v1(57.95,65.863) C7.2 ; v1(59.05,65.85) R10.1 ; C10.2 C12.1 61.009,77.034 v1(61.4,77.425) ; v1(60.15,65.872) C8.2 ; C11.2 v1(60.259,78.816) ; C19.2 C19.2@64.55,73.725 ; C18.1 v1(65.475,75.25) ; C17.1 v1(65.475,76.15) ; v1(71.65,79.625) U4.7 ; v1(71.65,80.895) U4.6 ; U3.15 v1(71.775,75.525) ; U3.12 74.037,74.762 74.4,75.125 ; v1(74.375,77.825) U4.8 ; U4.4 v1(74.375,83.685) ; v1(74.4,75.45) 74.4,75.125 ; U3.11 74.763,74.762 74.4,75.125 ; U4.1 v1(77.1,79.625) ; U4.3 v1(77.1,82.165)
  Top Layer w0.305: U2.5 U2.7 U2.2 ; v1(70.65,65.1) C35.1 ; v1(71.875,66.1) C33.2 ; v1(76.225,66.1) C34.2
  Top Layer w0.38: v1(70.725,71.375) U3.19
  Top Layer w0.45: v1(62.4,63.05) C27.2 ; L3.1 v1(65.1,70.475) ; C19.2@64.55,73.725 v1(65.4,73.725) ; v1(65.5,64.634) C28.1 ; v1(66.75,65.625) C25.1
  Top Layer w0.52: v1(82.275,73.335) J1.2@85.345,73.335 ; v1(82.275,78.875) J1.2@85.345,78.875
  Bottom Layer w0.254: v1(82.275,73.335) 85.345,73.335 J1.2@85.35,73.33 ; v1(82.275,78.875) 85.345,78.875 J1.2@85.35,78.87
  other v1: 59.575,51.825 59.575,52.7 59.575,53.575 60.525,54.525 61.4,54.525 62.275,54.525 64.375,56.825 64.375,57.7 64.375,58.575 65.225,59.75 66.1,59.75 66.975,59.75
  other v2: 65.925,70.625 66.7,70.825 67.5,70.95 68.3,71.05 69.125,71.175 69.9,71.275 78.8,72.825 70.46,72.847 69.545,72.873 79.475,72.875 68.656,73 80.15,73.075 67.894,73.127 67.107,73.304 66.319,73.482 80.7,73.6 82.144,74.067 81.275,74.15 78.9,74.55 81.763,74.677 79.6,74.925 80.15,75.55 77.525,75.625 80.7,76.225 74.375,76.275 78.3,76.275 71.2,76.3 70.425,76.675 79.15,76.875 81.35,76.875 74.375,77 69.625,77.1 82.093,77.189 69,77.725 79.525,77.775 82.271,78.002 68.75,78.625 79.575,78.85 68.725,79.575 79.575,79.925 68.7,80.575 79.575,80.975 68.725,81.6 79.5,82.05 68.85,82.675 79.175,83.125 69.35,83.5 78.55,83.9 73.65,84.1 70.1,84.125 75.125,84.15 72.925,84.4 75.875,84.4 77.65,84.4 76.725,84.45 71.05,84.475 72,84.5
  other v3: 51.925,47 50.8,47.05 50.775,48.175 51.325,54.575 52.25,54.575
  other v4: 73.2,70.55 74.4,70.55 75.6,70.55 73.2,71.75 74.4,71.75 75.6,71.75 73.2,72.95 74.4,72.95 75.6,72.95
  other v5: 57.125,71.075 58.125,71.075 59.125,71.075 57.125,72.075 58.125,72.075 59.125,72.075 58.125,73.075 59.125,73.075
  other v6: 52.142,50.825 53.158,50.825
GP0: InLand_Header.11 P1.4 Shoreline_Header.11 U1.10 | length 68
  Top Layer w0.178: InLand_Header.11 45.741,58.166 48.175,60.6 48.175,68.025 v2(49.075,68.925) 56.519,68.925 56.875,69.281 U1.10 ; v2(49.75,81.25) 54.325,85.825 57.475,85.825 64.275,92.625 67.095,92.625 68.285,91.435 P1.4
  Bottom Layer w0.178: v2(49.075,68.925) 48.675,69.325 48.675,80.175 v2(49.75,81.25)
  Bottom Layer w0.254: Shoreline_Header.11 37.338,59.436 39.878,59.436 InLand_Header.11
GP2: InLand_Header.13 P1.3 Shoreline_Header.13 U1.4 | length 55.3
  Top Layer w0.178: v2(54.725,72.325) U1.4
  Bottom Layer w0.178: InLand_Header.13 42.825,60.706 44.694,62.575 47.375,62.575 54.725,69.925 v2(54.725,72.325) 54.725,78.2 53.025,79.9 53.025,82.15 55.35,84.475 64.075,84.475 P1.3
  Bottom Layer w0.254: Shoreline_Header.13 37.338,61.976 39.878,61.976 InLand_Header.13
GP3: InLand_Header.15 Shoreline_Header.15 U1.3 | length 25.9
  Top Layer w0.178: v2(53.975,72.325) 54.475,72.825 U1.3
  Bottom Layer w0.178: InLand_Header.15 47.046,63.246 53.975,70.175 v2(53.975,72.325)
  Bottom Layer w0.254: Shoreline_Header.15 37.338,64.516 39.878,64.516 InLand_Header.15
MISO: InLand_Header.21 P1.10 Shoreline_Header.21 U1.9 | length 70
  Top Layer w0.178: InLand_Header.21 42.809,70.866 44.475,69.2 v2(46.775,69.2) 48.4,69.2 48.575,69.375 56.15,69.375 U1.9 ; v2(48.25,82.75) 52.875,87.375 56.875,87.375 63.7,94.2 72.93,94.2 P1.10
  Bottom Layer w0.178: v2(46.775,69.2) 46.775,81.275 v2(48.25,82.75)
  Bottom Layer w0.254: Shoreline_Header.21 37.338,72.136 39.878,72.136 InLand_Header.21
MOSI: InLand_Header.19 P1.8 Shoreline_Header.19 U1.7 | length 73.4
  Top Layer w0.178: InLand_Header.19 39.9,69.574 39.9,74.05 40.6,74.75 42.025,74.75 46.525,70.25 v2(47.425,70.25) 54.2,70.25 54.775,70.825 U1.7 ; v2(48.75,82.25) 53.375,86.875 57,86.875 63.8,93.675 70.915,93.675 P1.8
  Bottom Layer w0.178: v2(47.425,70.25) 47.425,80.925 v2(48.75,82.25)
  Bottom Layer w0.254: Shoreline_Header.19 37.342,69.6 39.874,69.6 InLand_Header.19
NetC5_2: C5.2 U1.6 | length 2.8
  Top Layer w0.178: C5.2 53.109,70.95 54.025,70.95 54.4,71.325 U1.6
NetC10_1: C10.1 U1.26 | length 1.4
  Top Layer w0.178: U1.26 59.375,75.666 C10.1
NetC13_1: C13.1 U1.29 | length 1.4
  Top Layer w0.178: C13.1 57.675,75.425 57.875,75.225 U1.29
NetC15_1: C15.1 U1.32 | length 1.7
  Top Layer w0.254: C15.1 56.375,75.266 U1.32
NetC15_2: C15.2 U7.3 | length 3.7
  Top Layer w0.254: U7.3 55.7,80.8 C15.2
NetC16_1: C16.1 U1.24 | length 2.6
  Top Layer w0.178: U1.24 61,73.825 61.15,73.975 61.15,75.159 C16.1
NetC16_2: C16.2 U1.23 | length 2
  Top Layer w0.178: U1.23 61.044,73.325 61.75,74.031 C16.2
NetC18_2: C18.2 U1.21 | length 4.3
  Top Layer w0.178: U1.21 60.95,72.325 62.675,74.05 62.675,74.559 C18.2
NetC19_1: C19.1 L1.2 L2.2 U1.20 | length 4.3
  Top Layer w0.254: U1.20 61.15,71.825 61.895,72.57 L2.2
  Top Layer w0.45: L2.2 63.37,72.57 L1.2 63.425,73.5 C19.1
NetC20_1: C20.1 L2.1 L3.2 U1.19 | length 4.3
  Top Layer w0.254: U1.19 61.525,71.325 61.78,71.58 L2.1
  Top Layer w0.45: L2.1 63.595,71.58 C20.1 63.625,71.225 63.425,71.025 L3.2
NetC20_2: C20.2 L1.1 U3.18 | length 9.2
  Top Layer w0.38: 71.4,72.125 U3.18
  Top Layer w0.45: L1.1 64.675,72.625
  Top Layer w0.6: C20.2 65.35,71.55 65.925,72.125 ; 64.675,72.625 65.425,72.625 65.925,72.125 ; 71.4,72.125 65.925,72.125
NetC21_1: C21.1 C25.2 L5.1 L6.2 | length 2.9
  Top Layer w0.45: C25.2 66.95,67.7 L5.1 L6.2 67.65,69.525 C21.1
NetC21_2: C21.2 L6.1 U3.20 | length 5.1
  Top Layer w0.38: 71.425,70.625 U3.20
  Top Layer w0.45: C21.2 68.65,69.425 L6.1 69.054,68.55
  Top Layer w0.6: 69.054,68.55 71.129,70.625 71.425,70.625
NetC22_1: C22.1 L7.2 U1.17 | length 4.3
  Top Layer w0.254: U1.17 61.275,70.325 61.525,70.075
  Top Layer w0.45: 61.525,70.075 61.525,68.8 61.775,68.55 C22.1 62.45,67.595 L7.2
NetC22_2: C22.2 C24.1 L4.2 | length 2
  Top Layer w0.45: C22.2 L4.2 64.25,67.7 C24.1
NetC23_1: C23.1 C24.2 L4.1 L5.2 | length 5.5
  Top Layer w0.45: C23.1 64.85,69.675 65.25,69.275 L4.1 ; C24.2 65.35,67.85 65.25,67.95 L4.1 ; L5.2 L4.1
NetC23_2: C23.2 U1.18 | length 2
  Top Layer w0.254: U1.18 61.1,70.825 62.2,70.825 C23.2
NetC26_2: C26.2 L7.1 R9.2 | length 2.3
  Top Layer w0.45: R9.2 61.58,66.58 L7.1 63.32,66.58 C26.2
NetJ1_1: J1.1 U3.7 | length 9.2
  Top Layer w0.38: U3.7 77.375,73.625
  Top Layer w0.6: 77.375,73.625 79.4,73.625 81.875,76.1 J1.1 J1.1@85.175,76.1
NetL8_1: L8.1 U3.10 | length 1.2
  Top Layer w0.304: L8.1@75.488,75.538 L8.1
  Top Layer w0.4: U3.10 L8.1@75.488,75.538
NetL8_2: L8.2 U4.2 | length 8.4
  Top Layer w0.4: L8.2 75.5,76.825
  Top Layer w0.6: 75.5,76.825 75.5,77.1 76,77.6 77.6,77.6 78.3,78.3 78.3,80.15 77.55,80.9 U4.2@75.91,80.9
NetL9_1: L9.1 U4.5 | length 10.2
  Top Layer w0.45: L9.1 L9.1@73.3,76.75
  Top Layer w0.6: U4.5@72.84,82.17 70.97,82.17 70.1,81.3 70.1,78.475 70.975,77.6 72.8,77.6 73.3,77.1 L9.1@73.3,76.75
NetL9_2: L9.2 U3.13 | length 1.2
  Top Layer w0.304: L9.2 L9.2@73.312,75.538
  Top Layer w0.4: U3.13 L9.2@73.312,75.538
NetR10_2: R10.2 U1.14 | length 1.6
  Top Layer w0.178: U1.14 58.875,68.975 59.05,68.8 R10.2
NetR15_1: R15.1 U2.3 | length 1.6
  Top Layer w0.254: R15.1 R15.1@50.211,51.8 ; R15.1@50.511,51.8 U2.3
NetR20_2: R20.2 U3.3 | length 4.3
  Top Layer w0.178: U3.3 77.875,70.625 78.392,70.108 78.392,68.758 79.15,68 R20.2
RST_CC: P1.7 R11.1 R12.2 | length 23.1
  Top Layer w0.178: R12.2 R11.1 v2(53.9,88.625)
  Bottom Layer w0.178: v2(53.9,88.625) 63.075,88.625 64.4,89.95 72.1,89.95 P1.7
RSTn_37: C30.1 R12.1 S2.1 S2.4 U1.2 U5.2 | length 38.6
  Top Layer w0.178: S2.4@44.4,99.975 S2.4@44.425,100 ; v2(48.625,89.775) 49.959,89.775 C30.1 51.166,89.791 R12.1 51.175,91.025 U5.2 ; v2(54.05,73.325) U1.2
  Top Layer w0.254: S2.4@44.4,99.975 48,99.975 48.625,99.35 v2(48.625,89.775)
  Bottom Layer w0.254: v2(48.625,89.775) 48.625,83.35 54.05,77.925 v2(54.05,73.325)
SCK: InLand_Header.23 P1.6 Shoreline_Header.23 U1.8 | length 62
  Top Layer w0.178: InLand_Header.23 44.804,69.75 v2(48.05,69.75) 54.275,69.75 54.85,70.325 U1.8 ; v2(49.25,81.75) 53.875,86.375 57.25,86.375 64.025,93.15 68.9,93.15 P1.6
  Bottom Layer w0.178: v2(48.05,69.75) 48.05,80.55 v2(49.25,81.75)
  Bottom Layer w0.254: Shoreline_Header.23 37.338,74.676 39.878,74.676 InLand_Header.23
TR: InLand_Header.16 R2.2 Shoreline_Header.16 U3.2 | length 55.9
  Top Layer w0.178: InLand_Header.16 39.904,61.95 41.975,61.95 42.775,61.15 v2(45.375,61.15) ; R2.2 v2(54.225,62.375) ; U3.2 77.625,69.875 v2(77.85,69.65)
  Top Layer w0.254: Shoreline_Header.16 34.798,64.516 37.338,64.516 InLand_Header.16
  Bottom Layer w0.178: v2(45.375,61.15) 47.8,61.15 48.325,61.675 53.525,61.675 v2(54.225,62.375) 54.275,62.375 54.975,61.675 73.575,61.675 77.85,65.95 v2(77.85,69.65)
VAPC: C36.2 R21.1 R22.2 U3.5 | length 5
  Top Layer w0.305: U3.5 77.825,72.125 78.1,71.85 C36.2 79.7,71.6 R21.1 R22.2
VREG: C2.1 C3.2 C4.2 C6.1 C7.1 C8.1 C9.2 C11.1 C12.2 C14.1 C17.2 C26.1 C27.1 C28.2 C29.2 P1.2 R9.1 R11.2 R15.2 U1.1 U1.5 U1.12 U1.13 U1.15 U1.22 U1.25 U1.27 U1.28 U2.1 U3.17 U5.3 U7.4 | length 48.4
  Top Layer w0.178: U1.22 60.975,72.825 62.35,74.2 62.35,75.775 62.725,76.15 C17.2
  Top Layer w0.254: U5.3 v1(55.05,92.3) ; R11.2 v1(56.225,89.8) ; U1.5 53.725,71.825 53.55,72 C4.2 53.059,72.766 v1(52.85,72.975) 53.059,73.184 C3.2 U1.1 ; v1(57.15,66.591) 57.15,67.541 ; U7.4 57.859,80.291 C14.1 v1(59.166,80.291) ; U1.12 57.875,69.05 57.675,68.85 57.4,68.85 56.375,67.825 C6.1 56.891,67.8 57.15,67.541 ; v1(58.109,78.916) C9.2 58.375,77.784 U1.28 ; U1.13 58.375,68.9 57.95,68.475 C7.1 57.934,67.784 57.393,67.784 57.15,67.541 ; U1.27 58.875,77.834 C11.1 v1(59.091,78.916) ; U1.15 59.375,69.1 60.15,68.325 C8.1 v1(61.141,67.809) ; U1.25 59.875,75.116 C12.2 60.941,75.866 61.575,76.5 v1(61.925,76.5) ; C17.2 v1(63.366,77.016) ; v1(69.475,73.7) C29.2 71.425,72.875 U3.17
  Top Layer w0.305: R15.2 v1(50.1,54.525)
  Top Layer w0.45: v1(61.375,64.075) R9.1 62.391,65.075 C27.1 63.084,65.084 C26.1 C28.2
  other v3: 53.375,54.625 54.2,54.625
pads on no net: P1.9 U1.16 U1.31 U3.14 U3.16 U3.25 U7.1

## Polygon pours and split planes (outlines as drawn)
GND on Top Layer "top_GND*" (solid, pour order 12): 58.75,51.125 62.375,51.125 63.125,51.875 67.625,51.875 67.625,60.5 58.75,60.5
3V6 on Top Layer "top_3V6" (solid, pour order 8): 68.5,60.5 68.5,43.75 79.5,43.75 79.5,57.125 76.125,60.5
5V on Top Layer "top_5V*" (solid, pour order 6): 58.75,50 62.375,50 63.5,48.875 67,48.875 67,43.75 58.75,43.75
GND on Top Layer "top_GND" (solid, pour order 4): 53.025,55.575 48.575,55.575 48.575,46.25 53.025,46.25
VREG on Top Layer "top_VREG" (solid, pour order 2): 54.625,51.475 53.05,51.475 53.05,52.725 52.925,52.85 52.925,55.575 54.625,55.575
5V on Top Layer "top_5V" (solid, pour order 0): 54.625,50.2 54.625,46.25 52.7,46.25 52.7,48.75 53.05,49.1 53.05,50.2
GND on Bottom Layer "GND_L04_P014" (solid, pour order 14): 87.376,102.108 87.376,37.084 31.242,37.084 31.242,102.108
GND on Internal Plane 1 (split plane): 86.968,37.492 31.65,37.492 31.65,101.7 86.968,101.7
VREG on Internal Plane 2 (split plane): 86.968,70.354 77.425,70.354 77.375,70.345 77.333,70.317 76.471,69.454 75.05,69.454 75,69.445 74.958,69.417 74.046,68.504 69.55,68.504 69.5,68.495 69.458,68.467 68.508,67.517 68.48,67.475 68.471,67.425 68.471,65.479 68.133,65.142 68.105,65.1 68.096,65.05 68.096,64.875 68.096,51.729 63.5,51.729 63.45,51.72 63.408,51.692 63.38,51.65 63.371,51.6 63.371,50.504 48.504,50.504 46.967,52.042 46.925,52.07 46.875,52.079 31.65,52.079 31.65,101.7 86.968,101.7
3V6 on Internal Plane 2 (split plane): 86.968,37.492 68.354,37.492 68.354,49.075 68.345,49.125 68.317,49.167 68.275,49.195 68.225,49.204 63.629,49.204 63.629,50.35 63.629,51.471 68.225,51.471 68.275,51.48 68.317,51.508 68.345,51.55 68.354,51.6 68.354,64.875 68.354,64.996 68.692,65.333 68.72,65.375 68.729,65.425 68.729,67.371 69.604,68.246 74.1,68.246 74.15,68.255 74.192,68.283 75.104,69.196 76.525,69.196 76.575,69.205 76.617,69.233 77.479,70.096 86.968,70.096
5V on Internal Plane 2 (split plane): 48.358,50.283 48.4,50.255 48.45,50.246 63.371,50.246 63.371,49.075 63.38,49.025 63.408,48.983 63.45,48.955 63.5,48.946 68.096,48.946 68.096,37.492 31.65,37.492 31.65,51.821 46.821,51.821

## Other copper
Internal Plane 2 (plane layer: these items are gaps in the copper):
  lines w0.254: 31.242,51.95 41.475,51.95 46.875,51.95 48.45,50.375 62.2,50.375 63.475,50.375 63.5,50.35 ; 68.225,37.084 68.225,49.075 63.5,49.075 63.5,50.35 ; 87.326,70.225 77.425,70.225 76.525,69.325 75.05,69.325 74.1,68.375 69.55,68.375 68.6,67.425 68.6,65.425 68.225,65.05 68.225,64.875 68.225,51.6 63.5,51.6 ; 63.5,50.35 63.5,51.6 ; 63.5,51.6 63.5,51.6

## Silkscreen, mask and mechanical layers (free items; w line width, h text height)
Top Overlay:
  circle w0.254: c33.53,63.25 r0.975
  circle w0.254: c33.53,58.17 r0.975
  circle w0.254: c38.61,58.17 r0.975
  circle w0.254: c38.61,63.25 r0.975
  circle w0.254: c33.533,45.481 r0.975
  circle w0.254: c33.533,48.006 r0.975
  circle w0.254: c38.608,48.006 r0.975
  circle w0.254: c38.608,45.481 r0.975
  circle w0.254: c63.75,88.7 r0.071
  circle w0.254: c63.75,88.7 r0.301
  circle w0.508: c43.225,45.375 r0.254
  circle w0.254: c41.15,58.175 r0.975
  circle w0.254: c41.15,60.7 r0.975
  circle w0.254: c41.15,63.25 r0.975
  circle w0.254: c41.15,68.325 r0.975
  circle w0.254: c41.15,70.875 r0.975
  circle w0.254: c41.15,73.4 r0.975
  circle w0.254: c38.6,73.4 r0.975
  circle w0.254: c33.525,73.4 r0.975
  circle w0.254: c36.075,73.4 r0.975
  circle w0.254: c36.075,70.875 r0.975
  circle w0.254: c36.075,68.325 r0.975
  circle w0.254: c36.075,63.25 r0.975
  circle w0.254: c36.075,60.7 r0.975
  circle w0.254: c36.075,58.175 r0.975
  lines w0.127: 36.83,44.196 37.338,44.704 ; 37.084,44.196 37.084,44.45 ; 41.91,44.196 42.418,44.704 ; 42.418,44.196 42.164,44.45 ; 37.084,44.45 37.338,44.196 37.338,44.45 37.084,44.45 ; 42.164,44.45 42.164,44.196 42.418,44.45 42.164,44.45
  lines w0.152: 55.725,78.475 56.85,77.35 ; 57.2,77 56.85,77.35 ; 61.05,76.8 62.55,76.8 63.675,77.925 63.675,78.7 63.875,78.9 ; 62.15,75.825 63.85,77.525 ; 63.8,80.35 63.35,79.9 63.35,78.075 62.875,77.6 60.325,77.6 59.925,77.2 ; 78.6,64.55 78.05,65.1 78.05,67.8 77.4,68.45 ; 56.85,77.35 56.85,77.35 ; 59.925,77.2 59.925,77.2 ; 77.4,68.45 77.4,68.45
  text "RESET" at 43.825,97.725 h1.02
  text "40MHz" at 53.95,82.9 h1.02
  text "LinkBerry 1.0" at 62.025,39.775 h1.45
  text "Open  / Hardware" at 40.675,38.65 h1.4
Bottom Overlay:
  circle w0.254: c38.61,58.17 r0.975
  circle w0.254: c33.53,58.17 r0.975
  circle w0.254: c38.61,58.17 r0.975
  circle w0.254: c38.61,63.25 r0.975
  circle w0.254: c33.53,63.25 r0.975
  circle w0.254: c33.533,45.481 r0.975
  circle w0.254: c33.533,48.006 r0.975
  circle w0.254: c38.608,48.006 r0.975
  circle w0.254: c38.608,45.481 r0.975
  circle w0.254: c41.15,58.175 r0.975
  circle w0.254: c41.15,60.7 r0.975
  circle w0.254: c41.15,63.25 r0.975
  circle w0.254: c41.15,68.325 r0.975
  circle w0.254: c41.15,70.875 r0.975
  circle w0.254: c41.15,73.4 r0.975
  circle w0.254: c38.6,73.4 r0.975
  circle w0.254: c33.525,73.4 r0.975
  circle w0.254: c36.075,73.4 r0.975
  circle w0.254: c36.075,70.875 r0.975
  circle w0.254: c36.075,68.325 r0.975
  circle w0.254: c36.075,63.25 r0.975
  circle w0.254: c36.075,60.7 r0.975
  circle w0.254: c36.075,58.175 r0.975
  lines w0.178: 59.575,50.375 59.575,53.45 ; 70.325,53.45 70.325,64.6 ; 76.6,44.2 76.6,50.375 ; 79.275,53.45 79.275,64.6 ; 86.95,44.2 53.375,44.2 53.375,50.375 86.975,50.375 ; 86.975,53.45 59.575,53.45 ; 86.988,64.6 59.575,64.6 59.575,53.45
  text "USE ONE SPI MASTER AT A TIME  / CC DEBUGGER OR RASPBERRY PI" at 86.975,84.35 h1.02
  text "Git: https://github.com/MonkHelios" at 86.825,81.575 h1.37
  text "PI GPIO  RF GPIO  FEM* CTRL / GP17      GP0      --  / GP27      GP2      -- / GP22      GP3      --   / GP18       --      BYP    / GP23       --      TR /  / * FEM: FRONT END MODULE" at 86.8,51.1 h1.02
  text "TR  MODE / 1   TX / 0   RX" at 86.1,45 h1.02
  text "BYP   MODE / 1     PA/LNA DISABLE / 0     PA/LNA ENABLE" at 74.55,44.9 h1.02
  text "433MHz" at 50.175,39.75 h1.52
  text "FEB 2019" at 76.2,39.575 h1.4
Board Outline:
  lines w0.178: 31.242,37.084 87.376,37.084 87.376,102.108 31.242,102.108 31.242,37.084
  lines w0.254: 31.242,103.645 31.242,104.153 ; 32.766,103.391 31.242,103.899 ; 32.766,104.407 31.242,103.899 ; 51.412,103.899 31.242,103.899 ; 67.206,103.899 87.376,103.899 ; 85.852,103.391 87.376,103.899 ; 85.852,104.407 87.376,103.899 ; 87.376,103.645 87.376,104.153 ; 88.621,38.608 89.129,37.084 ; 88.621,100.584 89.129,102.108 ; 88.875,37.084 89.383,37.084 ; 88.875,102.108 89.383,102.108 ; 89.129,61.572 89.129,37.084 ; 89.129,77.62 89.129,102.108 ; 89.637,38.608 89.129,37.084 ; 89.637,100.584 89.129,102.108
  text "56.134 (mm)" at 51.666,102.985 h1.52
  text "65.024 (mm)" at 90.043,61.826 h1.52 r90
Cu_to_edge:
  rectangle: 47.3,100.9 48.7,101.95
  rectangle: 43.7,100.9 45.1,101.95
  rectangle: 83.35,72.575 87.375,74.075
  rectangle: 83.05,75.35 87.375,76.85
  rectangle: 83.35,78.125 87.375,79.625
Via_PTH_Rules:
  text "Plate all holes (including vias) which have a hole size below 100mil. / Do not plate holes which are above 200mil." at 95.15,92.175 h1.37